# Altium PCB ESP32-TEC.PcbDoc
Units mil, origin at the board's own origin, x right, y up, seen from the top; angles counter-clockwise.
Board outline 2231 x 1575 mil, 2 copper layers (Top Layer, Bottom Layer), stack 61.756 mil thick; 63 components, 62 nets, 252 pads, 72 vias.
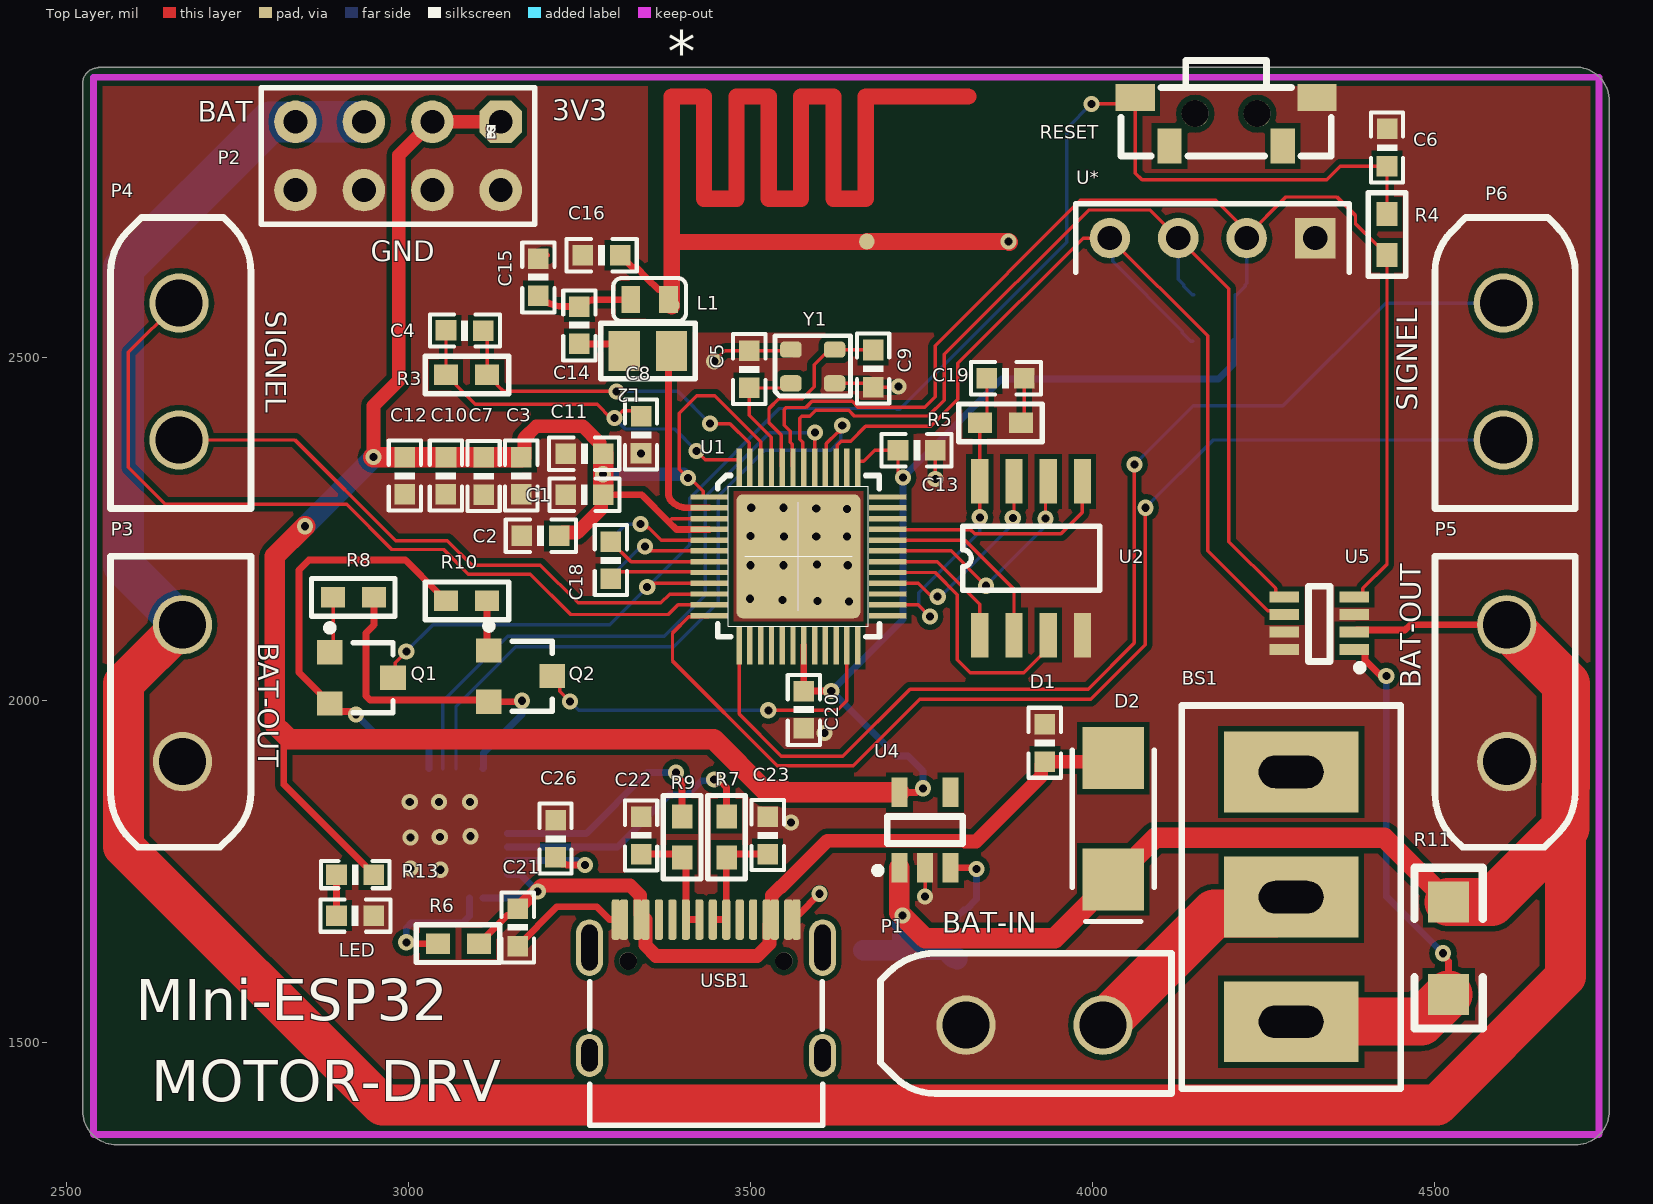
[diagram p0: Top Layer view]
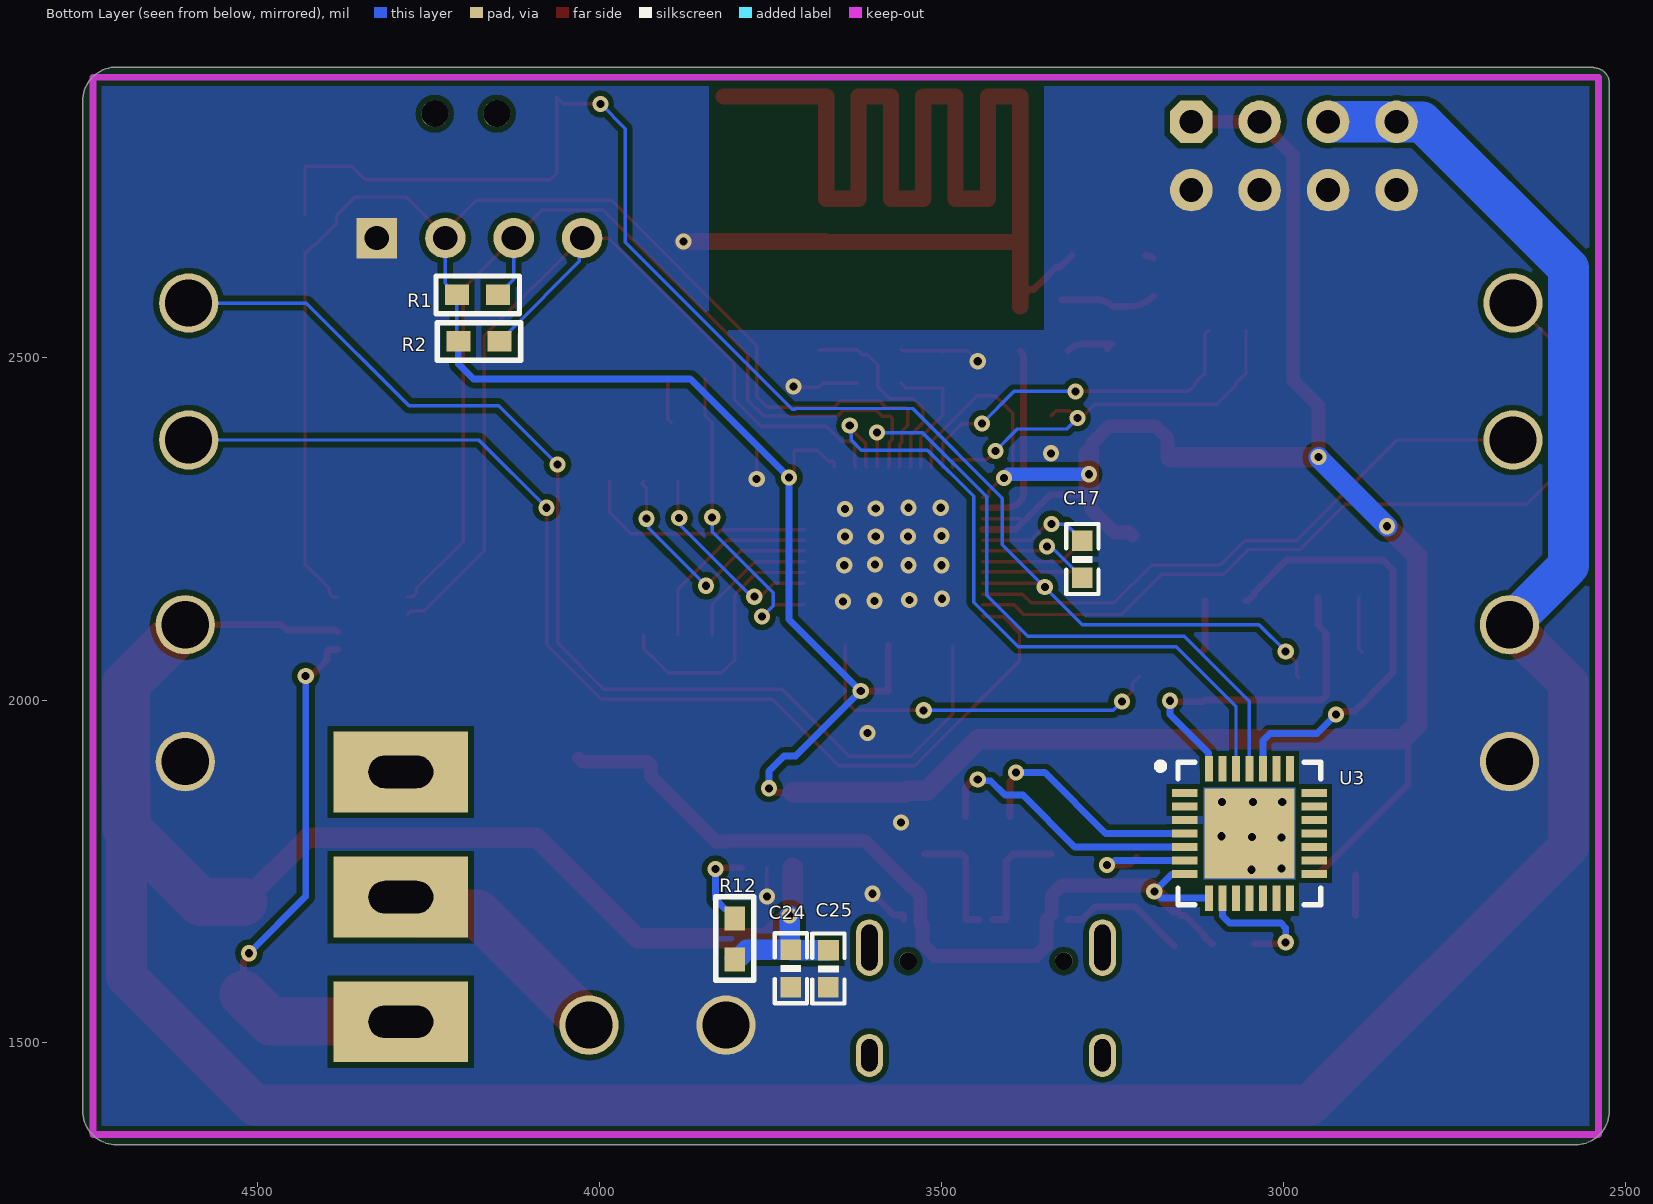
[diagram p1: Bottom Layer view, seen from below]

## Layer stack, top to bottom
Top Solder: solder mask 1, SM-001, Dk 4
Top Layer: signal copper 1.378
Dielectric 1: core 59, Core-043, Dk 4.3
Bottom Layer: signal copper 1.378
Bottom Solder: solder mask 1, SM-001, Dk 4

## Board outline
2524,1400 2524,2900.85 cw(c2546.88,2900.85) 2546.88,2923.73 2546.88,2925 4705,2925 cw(c4705,2875) 4755,2875 4755,1400 cw(c4705,1400) 4705,1350 2574,1350 cw(c2574,1400)

## Design rules (kind name [scope] priority, off if disabled: settings)
Clearance [All] p1: gap=8 ignorepadtopadclearanceinfootprint=TRUE
ComponentClearance [All] p1: gap=0.1 collisioncheckmode=3 verticalgap=0.1 showdistances=FALSE
MinimumSolderMaskSliver [All] p1: minsoldermaskwidth=0
PlaneConnect [All] p1: planeconnectstyle=Direct reliefexpansion=20 reliefentries=4 reliefconductorwidth=10 reliefairgap=10
PolygonConnect [All] p1: connectstyle=Direct reliefconductorwidth=10 reliefentries=4 polygonreliefangle="90 Angle" airgapwidth=10
RoutingVias [All] p1: holewidth=12 width=20 viastyle="Through Hole" minholewidth=12 minwidth=20 maxholewidth=12 maxwidth=20
SilkToSilkClearance [All] p1: silktosilkclearance=0
SilkToSolderMaskClearance [IsPad] p1: minsilkscreentomaskgap=0 clearancetoexposedcopper=TRUE
SolderMaskExpansion [All] p1: expansion=4 istentingtop=FALSE
Width [All] p1: maxlimit=100 minlimit=5 preferedwidth=20
25 further rules are at their usual default settings.

## Components (designator, comment, footprint, x,y, rotation, side; value= is the part's Value field where it differs from the comment)
* "天线" WIFI-ANT 3385,2575 r0 top
BS1 "SW-3" 纽子开关 4290,1710 r180 top
C1 "1uF" 0603-C 3230,2300 r0 top
C2 "100nF" 0603-C 3166,2240 r0 top
C3 "22uF" 0603-C 3164.94,2300.5 r90 top
C4 "3nF" 0603-C 3055,2540 r0 top
C5 "22pF" 0603-C 3498,2456 r90 top
C6 "100nF" 0603-C 4430,2780 r90 top
C7 "100nF" 0603-C 3110,2300 r90 top
C8 "1uF" 0603-C 3339.94,2360.5 r90 top
C9 "22pF" 0603-C 3679,2457 r90 top
C10 "1uF" 0603-C 3054.94,2300.5 r90 top
C11 "CAP_2" 0603-C 3284.5,2359.94 r180 top
C12 "100nF" 0603-C 2994.94,2300.5 r90 top
C13 "100nF" 0603-C 3770,2365 r180 top
C14 "1pF" 0603-C 3250,2575 r270 top
C15 "NC" 0603-C 3190,2645 r270 top
C16 "NC" 0603-C 3255,2650 r0 top
C17 "270pF" 0603-C 3294.06,2178.5 r90 bottom
C18 "270pF" 0603-C 3296,2177 r90 top
C19 "1uF" 0603-C 3845.5,2470.06 r0 top
C20 "100nF" 0603-C 3578,2013 r270 top
C21 "47pF" 0603-C 3160,1695 r270 top
C22 "47pF" 0603-C 3340.06,1829.5 r270 top
C23 "47pF" 0603-C 3525,1775 r90 top
C24 "47uF" 0603-C 3720.06,1580.5 r90 bottom
C25 "100nF" 0603-C 3665.13,1580 r90 bottom
C26 "47pF" 0603-C 3215,1770 r90 top
D1 "SMBJ5.0A" 0603-C 3930,1910 r90 top
D2 "Diode SS34" DIODE-SMA 4030,1826.42 r270 top
L1 "Inductor" 0603AR 3380.12,2585 r180 top value=0R
L2 "Inductor" 0805_L 3350,2510 r0 top value=20nH
LED "LED" 0603-C 2895,1685 r0 top (schematic designator PPS1)
P1 "HDR1X2_180_2.54" XT-30 4115,1425 r180 top
P2 "Header 4X2" HDR2X4 3135,2845 r180 top
P3 "HDR1X2_180_2.54" XT-30 2770,2210 r270 top
P4 "HDR1X2_180_2.54" XT-30 2565,2280 r90 top
P5 "HDR1X2_180_2.54" XT-30 4705,2210 r270 top
P6 "HDR1X2_180_2.54" XT-30 4500,2280 r90 top
Q1 "NPN_2" "SOT-23R - duplicate2" 2926.26,2032.4 r270 top
Q2 "NPN_2" "SOT-23R - duplicate2" 3158.74,2035 r270 top
R1 "Res1" 0603-R 4148,2592 r0 bottom value=4.7K
R2 "Res1" 0603-R 4146,2524 r0 bottom value=4.7K
R3 "Res1" 0603-R 3115,2475 r180 top value=4.7K
R4 "Res1" 0603-R 4430,2710 r270 top value=100K
R5 "Res1" 0603-R 3895,2405 r180 top value=1K
R6 "Res1" 0603-R 3043,1644 r0 top value=10K
R7 "Res1" 0603-R 3465,1770 r90 top value=100K
R8 "12K" 0603-R 2890,2150 r0 top
R9 "Res1" 0603-R 3400,1770 r90 top value=100K
R10 "12K" 0603-R 3115,2145 r180 top
R11 "0.01R" 1206 4520,1705 r270 top
R12 "10K" 0603-R 3802,1681 r270 bottom
R13 "RES" 0603P 2922.5,1744.94 r180 top
RESET "KEY" 侧帖按键 4195,2845 r180 top (schematic designator key1)
U1 "ESP32-QFN" QFN48-6x6 3451.89,2091.89 r0 top
U2 "SPIFLASH SOP8W" SOP-8 3835,2095 r90 top
U3 "CP2102" QFN28 3050,1805 r180 bottom
U4 "AP2112K" LC-SOT-23-5 3755,1810 r270 top
U5 "INA219" LC-SOT-23-8 4331.18,2112.2 r0 top
U* "OLED1" HDR1X4 4325,2675 r180 top
USB1 "Type-C" Type-c 3440,1540 r270 top
Y1 "XTAL_2520-26M" 2520无源 3590.89,2487.39 r0 top

## Footprints (in the part's own frame and the unit in brackets; to place one, negate y for a bottom-side part, rotate by r counter-clockwise, add the part's x,y. Pads: shape width x height; smd on the part's side, far side on the other; paste and mask are expansions set on the pad)
0603-C [mil]
  rect 30x30 smd: 1(0,0) 2(54.5,-0.06)
  silkscreen extent -24,-24 79,24
0603-R [mil]
  rect 35x30 smd: 1(0,0) 2(60,0)
  silkscreen extent -31,-28 91,28, body extent -22,-19 82,19, height 39
0603AR [mm]
  rect 0.7x1 smd: 1(0,0) 2(1.4,0)
  silkscreen extent -0.65,-0.8 2.05,0.8, body extent -0.1,-0.4 1.5,0.4, height 0.3
0603P [mil]
  rect 30x30 smd: 1(-27,0) 2(27.5,-0.06)
  silkscreen extent -50,-20 50,20
0805_L [mm]
  rect 1.16x1.47 smd: 1(-0.875,0) 2(0.875,0)
  silkscreen extent -1.76,-1.04 1.76,1.03, body extent -1.02,-0.64 1.03,0.64, height 0.6
1206 [mil]
  rect 60x60 smd: 1(0,0) 2(135,0)
  silkscreen extent -50,-50 185,50
2520无源 [mm]
  rrect50% 0.8x0.6 smd: 1(-0.81,-0.625) 2(0.81,-0.625) 3(0.81,0.625) 4(-0.81,0.625)
  silkscreen extent -1.4,-1.1 1.4,1.14
DIODE-SMA [mm] "贴片二极管"
  rect 2.3x2.3 smd: 1(-2.25,0) 2(2.25,0)
  silkscreen extent -2.54,-1.52 3.81,1.52, body extent -2.92,-1.4 2.92,1.4, height 3
HDR1X4 [mm] "Connector; Header; 4 Position"
  rect 1.5x1.5 hole 0.9: 1(0,0)
  round 1.5 hole 0.9: 2(2.54,0) 3(5.08,0) 4(7.62,0)
  silkscreen extent -1.27,-1.27 8.89,1.27
HDR2X4 [mil]
  oct 62x62 hole 35: 1(0,0)
  round 62 hole 35: 2(0,100) 3(100,0) 4(100,100) 5(200,0) 6(200,100) 7(300,0) 8(300,100)
  silkscreen extent -50,-50 350,150
LC-SOT-23-5 [mm]
  rect 1.1x0.6 smd: 1(1.4,-0.95) 2(1.4,0) 3(1.4,0.95) 4(-1.4,0.95) 5(-1.4,-0.95)
  silkscreen extent -0.5,-1.87 1.62,1.4
LC-SOT-23-8 [mm]
  rect 1.1x0.4 smd mask+0.051: 1(1.3,-0.975) 2(1.3,-0.325) 3(1.3,0.325) 4(1.3,0.975) 5(-1.3,0.975) 6(-1.3,0.325) 7(-1.3,-0.325) 8(-1.3,-0.975)
  silkscreen extent -0.4,-1.77 1.63,1.38
QFN28 [mm] "QFN, 28-Leads, Body 5.00x5.00mm, Pitch 0.50mm, Thermal Pad 3.13x3.13mm, IPC Medium Density"
  rect 0.95x0.3 smd: 1(-2.4,1.5) 2(-2.4,1) 3(-2.4,0.5) 4(-2.4,0) 5(-2.4,-0.5) 6(-2.4,-1) 7(-2.4,-1.5) 15(2.4,-1.5) 16(2.4,-1) 17(2.4,-0.5) 18(2.4,0) 19(2.4,0.5) 20(2.4,1) 21(2.4,1.5)
  rect 0.3x0.95 smd: 8(-1.5,-2.4) 9(-1,-2.4) 10(-0.5,-2.4) 11(0,-2.4) 12(0.5,-2.4) 13(1,-2.4) 14(1.5,-2.4) 22(1.5,2.4) 23(1,2.4) 24(0.5,2.4) 25(0,2.4) 26(-0.5,2.4) 27(-1,2.4) 28(-1.5,2.4)
  rect 3.35x3.35 smd: 29(0,0)
  silkscreen extent -3.43,-2.65 2.65,2.65, body extent -2.5,-2.5 2.5,2.5, height 0.9
QFN48-6x6 [mm]
  rrect10% 4.6x4.6 smd: 0(3,3)
  rect 1.4x0.2 smd: 1(-0.31,5.2) 2(-0.31,4.8) 3(-0.31,4.4) 4(-0.31,4) 5(-0.31,3.6) 6(-0.31,3.2) 7(-0.31,2.8) 8(-0.31,2.4) 9(-0.31,2) 10(-0.31,1.6) 11(-0.31,1.2) 12(-0.31,0.8) 25(6.31,0.8) 26(6.31,1.2) 27(6.31,1.6) 28(6.31,2) 29(6.31,2.4) 30(6.31,2.8) 31(6.31,3.2) 32(6.31,3.6) 33(6.31,4) 34(6.31,4.4) 35(6.31,4.8) 36(6.31,5.2)
  rect 0.2x1.4 smd: 13(0.8,-0.31) 14(1.2,-0.31) 15(1.6,-0.31) 16(2,-0.31) 17(2.4,-0.31) 18(2.8,-0.31) 19(3.2,-0.31) 20(3.6,-0.31) 21(4,-0.31) 22(4.4,-0.31) 23(4.8,-0.31) 24(5.2,-0.31) 37(5.2,6.31) 38(4.8,6.31) 39(4.4,6.31) 40(4,6.31) 41(3.6,6.31) 42(3.2,6.31) 43(2.8,6.31) 44(2.4,6.31) 45(2,6.31) 46(1.6,6.31) 47(1.2,6.31) 48(0.8,6.31)
  silkscreen extent 0,0 6.01,6, body extent 0,0.01 6,6, height 1
SOP-8 [mil]
  rect 65x25 smd: 1(0,0) 2(0,-50) 3(0,-100) 4(0,-150) 5(224.41,-150) 6(224.41,-100) 7(224.41,-50) 8(224.41,0)
  silkscreen extent 65,-175 159,25
"SOT-23R - duplicate2" [mm]
  rect 0.9x0.95 smd: 1(0.95,-1.048) 2(-0.95,-1.048) 3(0,1.302)
  silkscreen extent -1.98,-1.17 1.3,1.3
Type-c [mm]
  round 0.65 hole 0.65: 0(-1.996,2.763) 0(-1.996,-3.017)
  oval 1.6x1 hole 0.6 slot 1.2 at 0 deg: 1(1.504,4.198) 2(1.504,-4.452)
  oval 2.1x1 hole 0.6 slot 1.7 at 0 deg: 3(-2.496,-4.452) 4(-2.496,4.198)
  rrect50% 1.5x0.3 smd: A1(-3.536,-3.477) A4(-3.536,-2.677) A5(-3.536,-1.377) A6(-3.536,-0.377) A7(-3.536,0.123) A8(-3.536,1.123) A9(-3.536,2.423) A12(-3.536,3.223) B1(-3.536,2.923) B4(-3.536,2.123) B5(-3.536,1.623) B6(-3.536,0.623) B7(-3.536,-0.877) B8(-3.536,-1.877) B9(-3.536,-2.377) B12(-3.536,-3.177)
  silkscreen extent -1.23,-4.45 4.1,4.2
WIFI-ANT [mil]
  round 23 smd: 1(0,2) 2(285,95)
  Top Layer lines w23.62: 0,0 0,2 0,10 0,74.94 0,75 0,94.49 ; 287.4,94.49 0,94.49 ; 433.07,307.09 283.46,307.09 283.46,157.48 236.22,157.48 236.22,307.09 188.98,307.09 188.98,157.48 141.73,157.48 141.73,307.09 94.49,307.09 94.49,157.48 47.24,157.48 47.24,307.09 0,307.09 0,94.49
XT-30 [mm]
  round 2.2 hole 1.75: 1(2.54,-2.54) 2(7.62,-2.54)
  silkscreen extent 0,-5.21 10.79,0
侧帖按键 [mm]
  rect 1.45x1 smd: 1(-3.375,-0.9) 2(3.375,-0.9)
  rect 0.9x1.3 smd: 3(-2.1,0.9) 4(2.1,0.9)
  round 1 hole 1 unplated: ""(-1.15,-0.3) ""(1.15,-0.3)
  silkscreen extent -3.9,-2.27 3.9,1.27
纽子开关 [mm]
  rect 5x3 hole 1.2 slot 2.4 at 0 deg: 1(0,-4.699) 2(0,-0.051) 3(0,4.572)
  silkscreen extent -4.06,-7.16 4.06,7.06, body extent -4.14,-6.63 3.86,6.57, height 33.36

## Part data
BS1: library part SW
C1 C2 C3 C4 C5 C6 C7 C8 C9 C10 C12 C13 C14 C15 C16 C17 C18 C19 C20 C21 C22 C23 C26: library part CAP_2
C24 C25: library part C1_6
D1: library part SMBJ, "TVS"
D2: library part "Diode 1N4001", "1 Amp General Purpose Rectifier", Code_JEDEC=DO-204-AL, ComponentLink1Description="Manufacturer Link", ComponentLink1URL=http://www.fairchildsemi.com/, ComponentLink2Description=Datasheet, ComponentLink2URL=http://www.fairchildsemi.com/ds/1N%2F1N4001.pdf, DatasheetVersion=1998, LatestRevisionDate=17-Jul-2002, LatestRevisionNote="Re-released for DXP Platform.", PackageDescription="Diode, Axial; Body 5.2 x 2.7 mm (LxDia. max), Lead Dia. 0.86 mm (max)", PackageReference=DO-41, PackageVersion=Aug-1999, Published=8-Jun-2000, Publisher="Altium Limited"
P1 P3 P4 P5 P6: "Header"
P2: "Header, 4-Pin, Dual row", LatestRevisionDate=17-Jul-2002, LatestRevisionNote="Re-released for DXP Platform.", Publisher="Altium Limited"
Q1 Q2: "NPN Bipolar Transistor", Code_JEDEC=TO-226-AA, LatestRevisionDate=17-Jul-2002, LatestRevisionNote="Re-released for DXP Platform.", PackageDescription="TO, Flat Index; 3 In-Line, Axial Leads; Body Dia. 4.8mm; Leads 0.55 x 0.51 mm (max)", PackageReference=TO-226-AA, Published=8-Jun-2000, Publisher="Altium Limited"
R1 R2 R3 R4 R5 R6 R7 R9 R13: "Resistor", LatestRevisionDate=17-Jul-2002, LatestRevisionNote="Re-released for DXP Platform.", Published=8-Jun-2000, Publisher="Altium Limited"
  R1 R2 R3 R4 R5 R6 R7 R9: PackageDescription="Axial Device, Thru-Hole; 2 Leads; 0.3 in Pin Spacing", PackageReference=AXIAL-0.3
  R13: PackageDescription="Axial Device, Thru-Hole; 2 Leads; 0.4 in Pin Spacing", PackageReference=AXIAL-0.4
R8 R10 R11 R12: library part RES, "Resistor", LatestRevisionDate=17-Jul-2002, LatestRevisionNote="Re-released for DXP Platform.", PackageDescription="Axial Device, Thru-Hole; 2 Leads; 0.4 in Pin Spacing", PackageReference=AXIAL-0.4, Published=8-Jun-2000, Publisher="Altium Limited"
U5: "SOT-8"
L1 L2: Code_IEC=1005, Code_JEITA=0402, LatestRevisionDate=17-Jul-2002, LatestRevisionNote="Re-released for DXP Platform.", PackageReference=0402-A, Published=8-Jun-2000, Publisher="Altium Limited"

## Via types
v1: diameter 23.62, hole 11.81, Top Layer to Bottom Layer, tented both sides, 72 vias

## Nets (pads, with @x,y where several pads share a name; then routed paths per layer and width w, separated by ;. In a path a pad name is that pad's centre, name@x,y a point inside that pad or via, vN(x,y) a via of type N, cw(c..) or ccw(c..) an arc to the next point about the centre after c; other vN are vias at no path point)
+3.3V: C1.2 C2.2 C3.2 C7.2 C10.2 C11.1 C12.2 C13.2 C20.1 P2.1 P2.3 R1.2 R2.2 R4.2 R13.1 U1.1 U1.3 U1.4 U1.19 U1.37 U1.43 U1.46 U4.5 U5.4 U*.2 | length 6879.6
  Top Layer w5: 3380.5,2260.5 3385.12,2265.12 U1.3 ; U1.1 3432.61,2296.61 3431.18,2298.05 3431.18,2305.12 3412.02,2324.28 v1(3408.72,2324.28) 3396,2337 3396,2419 3421.38,2444.38 3448,2444.38 3514.88,2377.5 U1.46 ; U1.43 3560.82,2341.63 3560.82,2373.94 3558.07,2376.68 3558.07,2392.7 3549,2401.77 3549,2424.55 3551.93,2427.48 3581.02,2427.48 3589.86,2436.31 3648.63,2436.31 3656.94,2428 3754.62,2428 3770,2443.38 3770,2518 3982,2730 4180,2730 4225,2685 U*.2@4225,2678 ; C20.1@3577.87,2013.13 C20.1 ; U1.37 3656.61,2347.39 3658.05,2348.82 3665.12,2348.82 3681.36,2365.06 C13.2 3715.5,2332.5 v1(3723,2325) ; U*.2 U*.2@4225,2678 ; U5.4 4389.43,2150.59 4394.81,2155.96 4394.81,2163.04 4430,2198.23 R4.2 4430,2652.5 4417.5,2665 4415,2665 4384,2696 4384,2708 4357,2735 4282,2735 U*.2@4225,2678
  Top Layer w10: 2818,1951 2818,1876.44 R13.1 ; C1.2 3341.06,2299.94 3380.5,2260.5 3391.63,2249.37 U1.4 ; C20.1@3577.87,2013.13 U1.19 ; C20.1 v1(3618,2013) ; U4.5 3742.43,1865.12 3748.31,1871 v1(3752,1871)
  Top Layer w20: v1(2949,2355) 2949,2430 2986,2467 2986,2796 P2.3 P2.1 ; C3.2 3169.71,2359.71 3169.71,2382.71 3187,2400 3255,2400 3279.5,2375.5 3279.5,2364.94 C11.1 ; C2.2 3225.5,2244.94 3246.94,2244.94 3282,2280 3282,2297.44 C1.2
  Top Layer w30: v1(2849,2254) 2805,2210 2805,1964 2818,1951 2826,1943 3446,1943 3521.5,1867.5 3549.59,1867.5 3551.97,1865.12 U4.5 ; v1(2949,2355) C12.2 C10.2 C3.2 ; C1.2 v1(3284.5,2329.94) C11.1
  Bottom Layer w5: R2.2 4208,2526 R1.2 4210.5,2592 4223,2604.5 4223,2607 4225,2609 U*.2
  Bottom Layer w10: v1(3752,1871) 3752,1896 3730,1918 3713,1918 v1(3618,2013) 3723,2118 v1(3723,2325) 3867,2469 4184,2469 4206,2491 R2.2
  Bottom Layer w20: v1(3284.5,2329.94) 3402.08,2329.94 3407.74,2324.28 v1(3408.72,2324.28)
  Bottom Layer w30: v1(2849,2254) 2949,2354 v1(2949,2355)
BAT: C24.2 C25.2 D2.2 P2.5 P2.7 P3.1 P5.1 R11.1 R12.2 U4.1 U5.2 | length 5870.3
  Top Layer w10: U5.2 4385.24,2102.28 4456.28,2102.28 4464,2110 P5.1
  Top Layer w30: U4.1 3717.6,1689.4 v1(3722,1685) 3755,1652 3944.16,1652 D2.2 4091.16,1799 4426,1799 R11.1
  Top Layer w60: P3.1 2584,2024 2584,1786 2962,1408 4503,1408 4691,1596 4691,1813
  Top Layer w70: R11.1 4583,1705 4691,1813 4691,1873.94 4691.31,1874.25 4691.31,2023.69 P5.1
  Bottom Layer w30: C25.2 3719.5,1634.5 C24.2 ; v1(3722,1685) 3722,1643 3718,1639 3720,1637 C24.2 ; R12.2 3802,1623.5 3795.93,1623.5 3784.43,1635 C24.2
  Bottom Layer w60: P3.1 2583.69,2196.31 2583.69,2613.68 2584,2613.99 2584,2631 2797.62,2844.62 2834.62,2844.62 P2.7 P2.5
BAT_IN: BS1.3 R11.2 U5.1 | length 819.3
  Top Layer w10: U5.1 4394.86,2073.82 4397.73,2070.94 4397.73,2058.45 4421.18,2035 v1(4429,2035) ; v1(4512,1630) 4512,1626.31 4520,1618.31 R11.2
  Top Layer w70: BS1.3 4480,1530 R11.2
  Bottom Layer w10: v1(4429,2035) 4429,1713 v1(4512,1630)
BAT_IN_B: BS1.2 P1.1 | length 352.5
  Top Layer w70: P1.1 4177.94,1687.94 4265.94,1687.94 BS1.2
CHIP_PU: C6.1 Q1.3 R4.1 RESET.2 U1.9 | length 2239.1
  Top Layer w5: Q1.3 2980.69,2035.57 2980.69,2054.69 v1(2997,2071) ; v1(3349,2165) 3349,2165.69 3349.31,2166 3353,2166 3357.63,2170.63 U1.9 ; v1(3998,2871) 4052.69,2871 RESET.2 4062.13,2769.87 4072,2760 4342,2760 4362,2780 C6.1 R4.1
  Bottom Layer w5: v1(2997,2071) 3036,2110 3294,2110 v1(3349,2165) 3411,2227 3411,2295 3542,2426 3713,2426 3713.93,2425.07 3718.07,2425.07 3962,2669 3962,2835 v1(3998,2871)
D+: C22.2 R9.1 USB1.A6 USB1.B7 | length 174.8
  Top Layer w10: C22.2 3395,1775 R9.1 3405.47,1764.53 USB1.B7 USB1.A6
D-: C23.1 R7.1 USB1.A7 USB1.B6 | length 172.7
  Top Layer w10: USB1.A7 USB1.B6 3464.53,1769.53 R7.1 3470,1775 C23.1
DTR: Q2.1 R8.2 U3.28 | length 504.3
  Top Layer w10: R8.2 2950,2110 2938,2098 2938,2005.78 2943.86,1999.92 3115.15,1999.92 Q2.1 3164.6,1997.6 v1(3166,1999)
  Bottom Layer w10: U3.28 3109.96,1900.39 3109.96,1922.7 3166,1978.74 v1(3166,1999)
GND: *.2 C1.1 C2.1 C3.1 C5.2 C6.2 C7.1 C8.1 C9.1 C10.1 C11.2 C12.1 C13.1 C15.1 C16.1 C19.2 C20.2 C21.2 C22.1 C23.2 C24.1 C25.1 C26.2 D1.2 LED.2 P1.2 P2.2 P2.4 P2.6 P2.8 P3.2 P5.2 R5.1 RESET.1 U1.0 U2.4 U3.3 U3.29 U4.2 U5.3 U5.7 U5.8 U*.1 USB1.A1 USB1.A12 USB1.B1 USB1.B12 Y1.2 Y1.4 | length 845
  Top Layer w5: v1(3447,2495) 3462.5,2510.5 C5.2@3496.5,2510.5 ; C5.2@3498.39,2508.61 C5.2@3496.5,2510.5 ; Y1.4 3557.5,2510.5 C5.2 C5.2@3496.5,2510.5 ; Y1.2 3673.21,2462.79 C9.1 3715,2457 v1(3716,2458) ; U4.2 v1(3755,1713) v1@3756,1712 ; C13.1 v1(3770,2323) v1@3771,2322 ; R5.1 3900,2410 C19.2
  Top Layer w10: C21.2 3217.44,1698 3275,1698 3293.79,1679.21 USB1.A1 USB1.B12 ; C15.1 cw(c3202.07,2632.93) C15.1@3202.07,2650 ; USB1.B1 3555.08,1685.22 3555.98,1686.13 3570.13,1686.13 v1(3601,1717)
  Top Layer w25: *.2 v1(3877,2670) v1@3878,2669
  other v1: 3047,1752 3003,1754 3003,1799 3046,1800 3091,1801 3559,1821 3002,1851 3045,1851 3090,1851 3608,1952 3644,2144 3598,2145 3547,2146 3499,2148 3500,2197 3548,2197 3642,2197 3597,2198 3549,2239 3596,2239 3641,2239 3500,2240 3641,2279 3596,2280 3501,2281 3548,2281 3339.94,2360.5
IO0: Q2.3 U1.23 | length 544.6
  Top Layer w5: Q2.3 3221.29,2023.71 3221.29,2012.71 v1(3236,1998) ; v1(3526,1985) 3627,1985 3640.87,1998.87 U1.23
  Bottom Layer w5: v1(3236,1998) 3249,1985 v1(3526,1985)
IO2: U1.22
IO4: U1.24
IO5: U1.34
IO12: U1.18
IO13: U1.20
IO14: U1.17
IO15: U1.21
IO16: U1.25
IO17: U1.27
IO18: U1.35
IO19: U1.38
IO23: U1.36
IO25: U1.14
IO26: U1.15
IO27: U1.16
IO32: P6.1 U1.12 | length 1696.9
  Top Layer w5: U1.12 3438.25,2121.95 3409.95,2121.95 3386,2098 3386,2057 3539,1904 3650,1904 3747,2001 3997,2001 4077,2081 v1(4077,2281)
  Bottom Layer w5: v1(4077,2281) 4176,2380 P6.1
IO33: P6.2 U1.13 | length 1669.1
  Top Layer w5: U1.13 3483.39,1979.61 3545,1918 3635,1918 3733,2016 3993.62,2016 4061,2083.38 v1(4061,2344)
  Bottom Layer w5: v1(4061,2344) 4147,2430 4278,2430 4428,2580 P6.2
IO34: P4.1 U1.10 | length 878.6
  Top Layer w5: P4.1 2834.38,2380 2981.38,2233 3057,2233 3093,2197 3193,2197 3248,2142 3369,2142 3381.88,2154.88 U1.10
IO35: P4.2 U1.11 | length 1215.4
  Top Layer w5: P4.2 2663,2580 2591,2508 2591,2340 2645,2286 2910,2286 2976,2220 3051.62,2220 3087.62,2184 3178,2184 3237,2125 3380,2125 3394,2139 3439.55,2139 U1.11
Net*_1: *.1 C16.2 L1.1 | length 101
  Top Layer w10: C16.2 3327.44,2632 3333.12,2632 3349,2616.12 3365.43,2599.69 3371.34,2599.69 3380.12,2590.91 L1.1
NetC4_1: C4.1 C8.2 R3.2 U1.48 | length 601.5
  Top Layer w5: C4.1 3055,2477.5 3070,2462.5 3070,2460 3098,2432 3276,2432 3296,2412 3302.17,2412 3313.17,2423 3332,2423 C8.2 ; v1(3421,2364) 3434,2351 3481.95,2351 3483.39,2349.56 U1.48
  Bottom Layer w5: v1(3301,2412) 3317,2396 3389,2396 v1(3421,2364)
NetC4_2: C4.2 R3.1 U1.47 | length 528.8
  Top Layer w5: C4.2 3115,2534.44 R3.1 3117.5,2475 3130,2462.5 3130,2460 3139,2451 v1(3304,2451) ; v1(3441,2404) 3470,2404 3497.86,2376.14 3497.86,2341.59 U1.47
  Bottom Layer w5: v1(3304,2451) 3394,2451 v1(3441,2404)
NetC14_1: C14.1 C15.2 L1.2 | length 141.9
  Top Layer w10: C15.2 ccw(c3227.36,2627.92) 3227.36,2575 C14.1 cw(c3274.14,2550.86) 3274.14,2585 L1.2
NetC14_2: C14.2 L2.1 | length 68.4
  Top Layer w10: C14.2 3290.2,2520.5 cw(c3290.2,2484.65) L2.1
NetC17_1: C17.1 U1.6 | length 169.5
  Top Layer w5: v1(3346,2224.44) 3348.93,2221.51 3348.93,2217.87 U1.6
  Bottom Layer w5: C17.1 3306.56,2191 3336.44,2220.87 3342.44,2220.87 v1(3346,2224.44)
NetC17_2: C17.2 U1.5 | length 165.3
  Top Layer w5: v1(3339,2257) 3344.04,2257 3349.19,2251.85 3351.15,2251.85 3369.38,2233.62 U1.5
  Bottom Layer w5: C17.2 3318,2257 v1(3339,2257)
NetC18_1: C18.1 U1.8 | length 148.3
  Top Layer w5: C18.1 3306.31,2187.31 3438.75,2187.31 U1.8
NetC18_2: C18.2 U1.7 | length 155.9
  Top Layer w5: C18.2 3296.06,2231.38 3325.32,2202.13 U1.7
NetC26_1: C26.1 U3.6 | length 164
  Top Layer w10: C26.1 3225,1760 3229.67,1760 3230.86,1758.81 v1(3258,1758.81)
  Bottom Layer w10: U3.6 3246.37,1765.63 3253.19,1758.81 v1(3258,1758.81)
NetL2_2: L2.2 U1.2 | length 279.7
  Top Layer w10: L2.2 ccw(c3395.19,2499.26) 3380,2499.26 3380,2302.07 ccw(c3397.07,2302.07) 3385,2290 ccw(c3407.05,2312.05) 3407.05,2280.87 U1.2
NetPPS1_1: LED.1 R13.2 | length 60
  Top Layer w10: LED.1 R13.2
NetQ1_2: Q1.2 R8.1 | length 82.3
  Top Layer w5: Q1.2 2890,2074.8 R8.1
NetQ2_2: Q2.2 R10.1 | length 73.6
  Top Layer w10: R10.1 3115,2074.88 Q2.2
NetR6_1: R6.1 U3.9 | length 193.5
  Top Layer w10: v1(2997,1646) 2999,1644 R6.1
  Bottom Layer w10: v1(2997,1646) 2997,1667 3004,1674 3079,1674 3089.37,1684.37 U3.9
NetR7_2: R7.2 U3.5 | length 408.6
  Top Layer w10: v1(3447,1884) 3449.61,1881.39 3455.97,1881.39 3465,1872.37 R7.2
  Bottom Layer w10: U3.5 3305.32,1785.32 3381,1861 3407,1861 3428,1882 3445,1882 v1(3447,1884)
NetR9_2: R9.2 U3.4 | length 351.1
  Top Layer w10: v1(3391,1894) 3391,1890.33 3400,1881.33 R9.2
  Bottom Layer w10: U3.4 3260,1805 3349,1894 v1(3391,1894)
NetR12_1: R12.1 U4.3 | length 123.4
  Top Layer w10: U4.3 3828.12,1754.88 v1(3830,1753)
  Bottom Layer w10: R12.1 3802,1683.5 3812,1693.5 3814.5,1693.5 3830,1709 v1(3830,1753)
RTS: Q1.1 R10.2 U3.24 | length 671.9
  Top Layer w10: v1(2923.51,1979) 2919.69,1979 2919.69,1979.14 2915.61,1983.22 2896.78,1983.22 Q1.1 2884.02,1995 2871.3,2007.72 2871.3,2008.7 2840,2040 2840,2190 2854.5,2204.5 2995.5,2204.5 3042.5,2157.5 3042.5,2155 3052.5,2145 R10.2
  Bottom Layer w10: v1@2922,1979 v1(2923.51,1979) 2951.51,1951 3020,1951 3030.32,1940.68 U3.24
SCK/CLK: U1.31 U2.6 | length 357.3
  Top Layer w5: U1.31 3793.13,2217.87 v1(3844,2167) ; v1(3931,2265) 3931,2309.41 3938,2316.41 U2.6
  Bottom Layer w5: v1(3844,2167) 3927.85,2250.85 3927.85,2261.85 v1(3931,2265)
SCL: R1.1 U1.42 U5.5 U*.3 | length 1502.7
  Top Layer w5: U1.42 3576.56,2341.63 3576.56,2376.57 3571.93,2381.21 3571.93,2411.55 3574.86,2414.48 3586.41,2414.48 3595.24,2423.31 3643.24,2423.31 3651.55,2415 3760,2415 3783,2438 3783,2505 3994,2716 4084,2716 U*.3 4199,2601 4199,2231.59 4267.56,2163.04 4267.56,2155.96 4272.93,2150.59 U5.5
  Bottom Layer w5: U*.3 4125,2615 4133,2607 4133,2604.5 4145.5,2592 R1.1
SCS/CMD: U1.30 U2.1 | length 205.4
  Top Layer w5: U1.30 3772.87,2202.13 3835,2140 U2.1
SDA: R2.1 U1.39 U5.6 U*.4 | length 1456.5
  Top Layer w5: U1.39 3626.43,2341.63 3626.43,2372.22 3632.58,2378.37 3646.37,2378.37 3668,2400 3763.38,2400 3803,2439.62 3803,2492 3986,2675 U*.4 4168,2532 4168,2218 4255.63,2130.37 4274.63,2130.37 U5.6
  Bottom Layer w5: U*.4 4029.1,2670.9 4029.1,2640.9 4131,2539 4131,2536.5 4143.5,2524 R2.1
SDI/SDI: U1.33 U2.5 | length 345.8
  Top Layer w5: U1.33 3700.68,2249 3821.45,2249 3827.76,2242.69 3953.69,2242.69 3985,2274 U2.5
SDO/SD0: U1.32 U2.2 | length 281.4
  Top Layer w5: U1.32 3813.38,2233.62 3885,2162 U2.2
SHD/SD2: U1.28 U2.7 | length 308.1
  Top Layer w5: U1.28 3745.37,2170.63 3765,2151 v1(3773.5,2151) ; v1(3883.22,2266) 3883.96,2266 3889,2271.04 3885,2275.04 U2.7
  Bottom Layer w5: v1(3773.5,2151) 3777.13,2151 3889,2262.87 3885.87,2266 v1(3883.22,2266)
SWP/SD3: U1.29 U2.3 | length 385.5
  Top Layer w5: U1.29 3769.67,2186.38 3802,2154.05 3802,2059 3821,2040 3899,2040 3924,2065 3925,2065 3935,2075 U2.3
U0RXD: U1.40 U3.26 | length 1000.3
  Top Layer w5: U1.40 3610.68,2341.63 3610.68,2374.86 3627.2,2391.37 3631.07,2391.37 3634,2394.3 v1(3634,2401)
  Bottom Layer w5: U3.26 3069.68,1990.68 3157,2078 3388,2078 3453,2143 3453,2297.62 3520.38,2365 3617,2365 3632,2380 3632,2399 v1(3634,2401)
U0TXD: U1.41 U3.25 | length 940.4
  Top Layer w5: U1.41 3593.62,2390.07 v1(3594.24,2390.69)
  Bottom Layer w5: U3.25 3050,1998 3145,2093 3374,2093 3434,2153 3434,2297 3527.69,2390.69 v1(3594.24,2390.69)
VBUS: C21.1 D1.1 D2.1 R6.2 U3.7 U3.8 USB1.A4 USB1.A9 USB1.B4 USB1.B9 | length 1344.5
  Top Layer w10: R6.2 3105.5,1644 3115.5,1654 3115.5,1656.5 3144,1685 3150,1685 C21.1
  Top Layer w20: C21.1 3187,1722 3194,1729 3324.29,1729 3338.83,1714.47 3338.83,1686.8 USB1.B9 3346.42,1641.58 3362,1626 3509.84,1626 3527.8,1643.96 3527.8,1671.62 USB1.A9@3531.17,1674.99 ; USB1.A9@3531,1683.61 3531,1714.29 3543.45,1726.74 3544.74,1726.74 3612.54,1794.54 3811.67,1794.54 3812.82,1793.39 3829.39,1793.39 3925,1889 3925,1905 D1.1 4025,1910 D2.1
  Bottom Layer w10: U3.8 3179.51,1710.51 v1(3189,1720) 3163.96,1745.04 3145.39,1745.04 U3.7
VDD_SDIO: C19.1 R5.2 U1.26 U2.8 | length 464.7
  Top Layer w5: U1.26 3744.87,2139.13 v1(3762,2122) ; v1(3835,2267) U2.8 R5.2 3845.5,2415.5 C19.1
  Bottom Layer w5: v1(3762,2122) 3746,2138 3746,2157 3835,2246 v1(3835,2267)
XTAL_N: C9.2 U1.44 Y1.3 | length 300.4
  Top Layer w5: U1.44 3545.07,2341.63 3545.07,2387.32 3527,2405.38 3527,2426 3541.48,2440.48 3575.64,2440.48 3593,2457.84 3593,2490 3607.79,2504.79 3615.57,2504.79 Y1.3 3678.56,2512 C9.2
XTAL_P: C5.1 U1.45 Y1.1 | length 193.2
  Top Layer w5: U1.45 3530,2340.94 3530,2384 3498,2416 C5.1 3552.21,2456 Y1.1 Y1.1@3558.89,2462.89
pads on no net: BS1.1 RESET. RESET.3 RESET.4 U3.1 U3.2 U3.10 U3.11 U3.12 U3.13 U3.14 U3.15 U3.16 U3.17 U3.18 U3.19 U3.20 U3.21 U3.22 U3.23 U3.27 U4.4 USB1.0 USB1.1 USB1.2 USB1.3 USB1.4 USB1.A5 USB1.A8 USB1.B5 USB1.B8

## Polygon pours and split planes (outlines as drawn)
GND on Top Layer "Top Layer-No Net" (solid, remove dead copper, pour order 0): 2479,3004 2504,2979 4893,2979 4893,1508 4648,1263 4575,1336 2353,1336
GND on Bottom Layer "Top Layer-No Net" (solid, remove dead copper, pour order 1): 2499,3042 5096,3042 4934,2880 4934,1339 2262,1339 2170,1431

## Keep-outs
Keep-Out Layer:
  lines w10: 2540,1365 2540,2910 4740,2910 4740,1365 2540,1365

## Other copper
Top Layer:
  pour cut-out: 3350,2905 3840,2905 3843.45,2901.55 3843.45,2536.43 3353.57,2536.43 3350,2540
Bottom Layer:
  pour cut-out: 3350,2905 3840,2905 3840,2540 3350,2540

## Silkscreen, mask and mechanical layers (free items; w line width, h text height)
Top Overlay:
  text "3V3" at 3210,2847 h30
  text "BAT" at 2692,2845 h30
  text "GND" at 2945,2641 h30
  text "SIGNEL" at 2792,2569 h30 r270
  text "SIGNEL" at 4474,2423 h30 r90
  text "BAT-OUT" at 2781,2084 h30 r270
  text "BAT-OUT" at 4479,2017 h30 r90
  text "BAT-IN" at 3780,1660 h30
  text "MIni-ESP32" at 2602,1532 h60
  text "MOTOR-DRV" at 2624,1414 h60
Mechanical 1:
  lines w10: 2546.88,2923.73 ccw(c2546.88,2900.85) 2524,2900.85 2524,1400 ccw(c2574,1400) 2574,1350 4705,1350 ccw(c4705,1400) 4755,1400 4755,2875 ccw(c4705,2875) 4705,2925 2546.88,2925

## Text inside footprints (layer, text, board x,y; h text height)
P2: Top Overlay "2" at 3130,2840 h20 r180; Top Overlay "1" at 3130,2840 h20 r180; Top Overlay "7" at 3130,2840 h20 r180; Top Overlay "8" at 3130,2840 h20 r180